# EAGLE board Frontplatten (EAGLE 9.6.2)

No outline drawn. Coordinates in mm, seen from the top.
Copper layers (1*16): Top 0.035mm / dielectric 1.5mm / Bottom 0.035mm
Design rules "default": minimum track width 6mil, minimum drill 0.35mm, track to track 6mil, track to pad 6mil, pad to pad 6mil, via to via 6mil, smd to smd 6mil, copper to edge 40mil, drill to drill 6mil, minimum pad ring 10mil, minimum via ring 8mil, stop-mask expansion 4mil, vias tented up to drill 0mil, thermal gap 10mil

## Placement (x,y rotation side)
E$1  [APPARATESTECKDOSE]  177.5,0 0 top
E$2  [APPARATESTECKDOSE]  155,0 0 top
E$3  [APPARATESTECKDOSE]  132.5,0 0 top
E$4  [APPARATESTECKDOSE]  110,0 0 top
E$5  [APPARATESTECKDOSE]  87.5,0 0 top
E$6  [APPARATESTECKDOSE]  65,0 0 top
E$7  [APPARATESTECKDOSE_SICHERUNG_SCHALTER_]  13,-25 0 top

## Library data of the parts
E$1-E$6 = Apparatesteckdose
E$7 = Apparatesteckdose_Sicherung_Schalter2

## Tracks (layer width: path | path; a pad name or v marks a point on that pad's centre or on a via)
(copper drawn outside any net)
  shapes: Top area x7